# Altium PCB stm32nes.PcbDoc
Units mil, origin at the board's own origin, x right, y up, seen from the top; angles counter-clockwise.
Board outline 7285 x 3450 mil, 2 copper layers (Top Layer, Bottom Layer); 78 components, 69 nets, 338 pads, 745 vias.
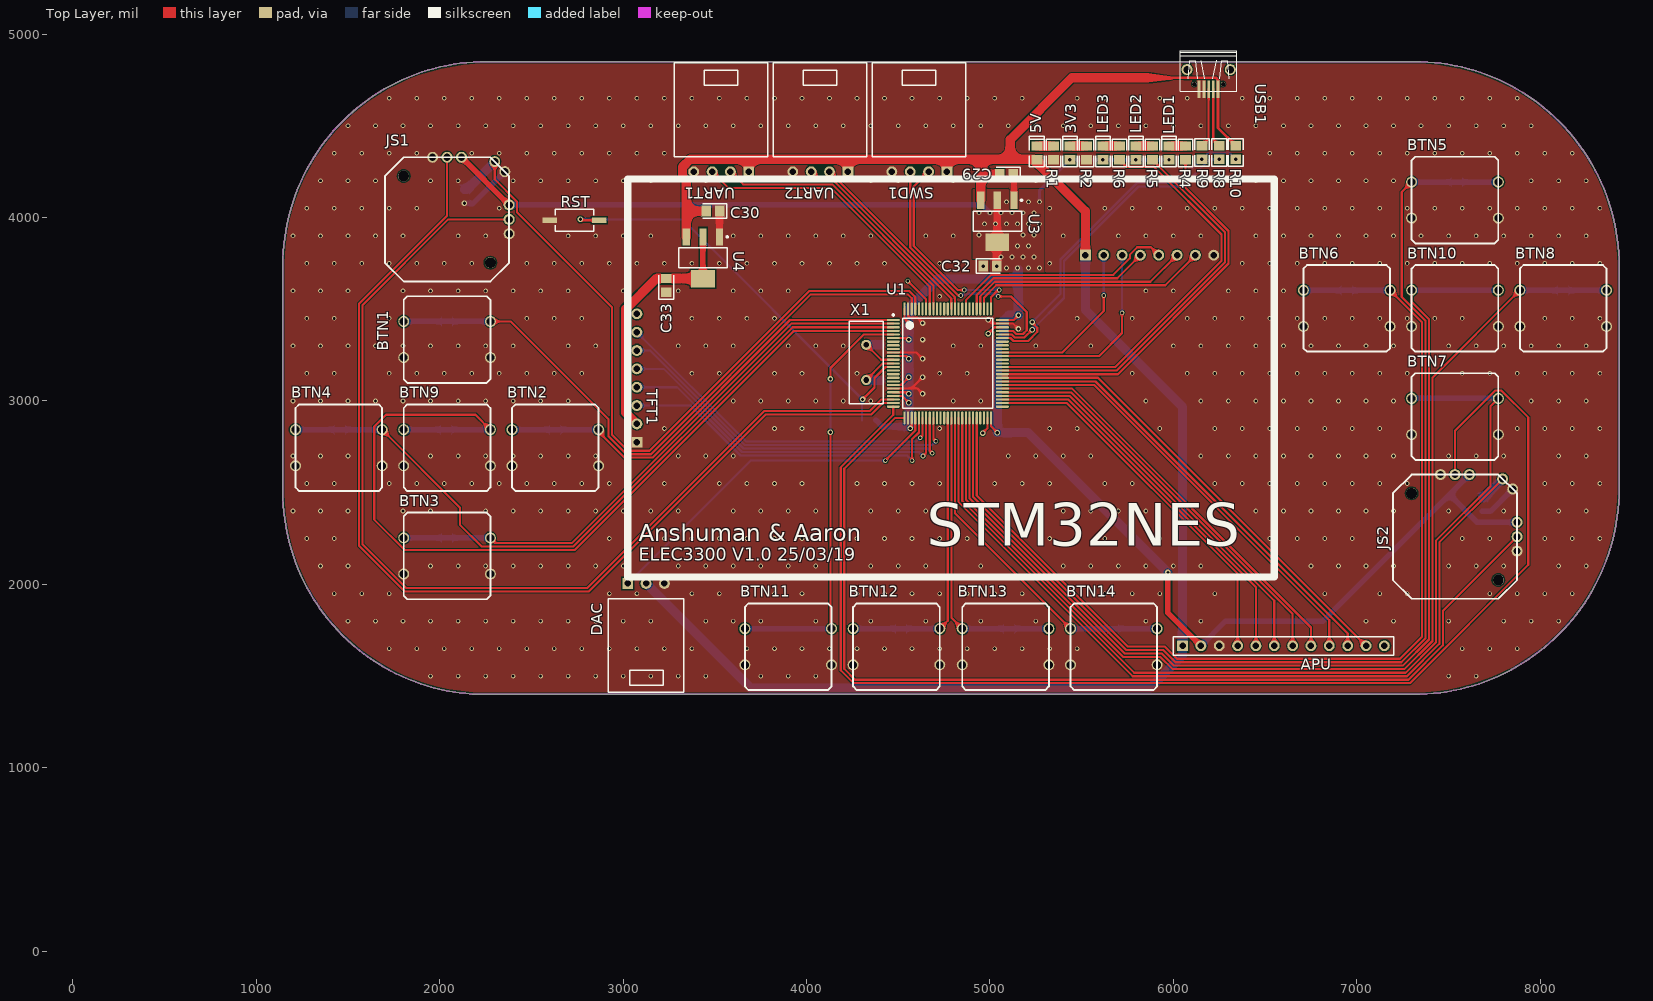
[diagram p0: Top Layer view]
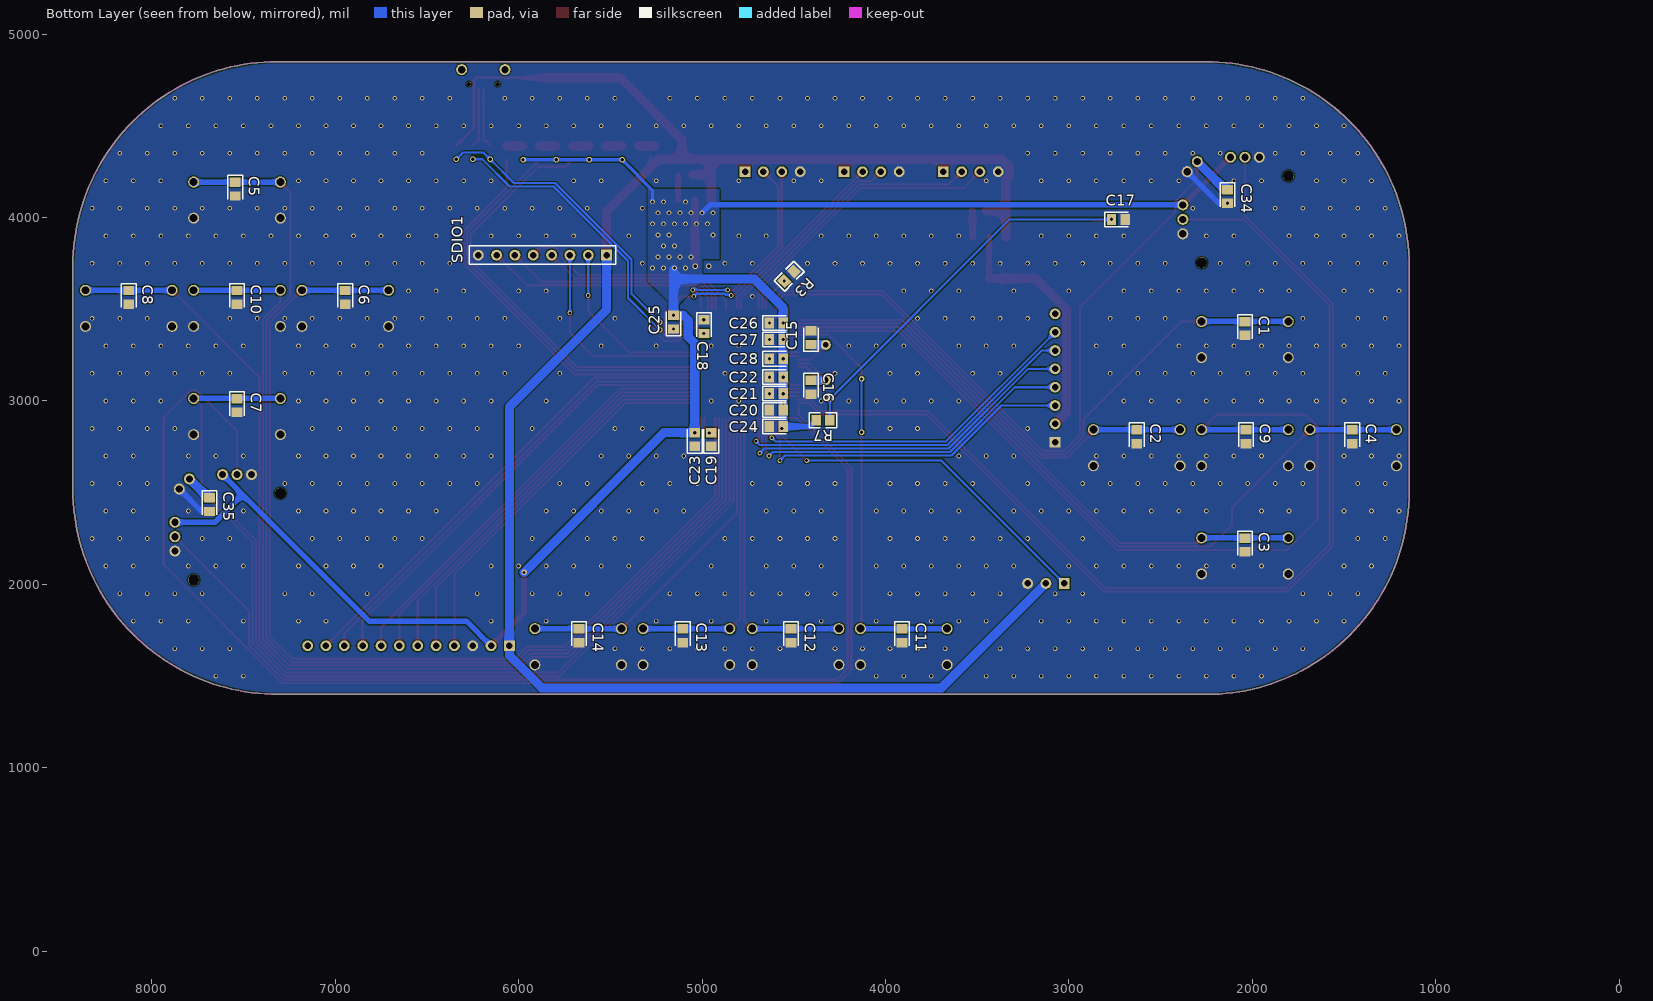
[diagram p1: Bottom Layer view, seen from below]
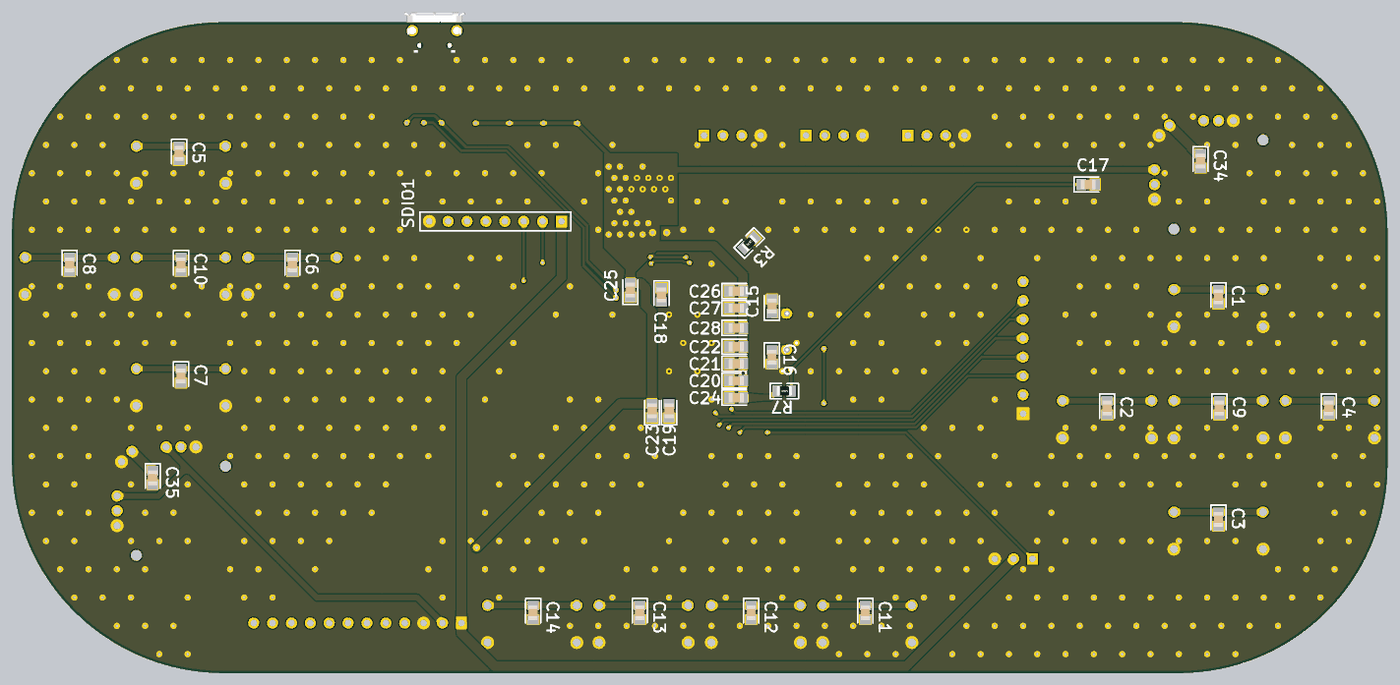
[diagram p2: 3D render of the assembled board from below, using the file's embedded part models]

## Layer stack, top to bottom
Top Solder: solder mask 0.4, Solder Resist, Dk 3.5
Top Layer: signal copper 1.4
Dielectric 1: dielectric 12.6, FR-4, Dk 4.8
Bottom Layer: signal copper 1.4
Bottom Solder: solder mask 0.4, Solder Resist, Dk 3.5

## Board outline
2250,1400 7310,1400 ccw(c7310,2520) 8430,2520 8430,3735 ccw(c7315,3735) 7315,4850 2255,4850 ccw(c2255,3740) 1145,3740 1145,2505 ccw(c2250,2505)

## Design rules (kind name [scope] priority, off if disabled: settings)
AssemblyTestPointUsage [All] p1 off:
AssemblyTestpoint [All] p1 off: testpointundercomponent=TRUE minsize=40 maxsize=100 preferedsize=60 minholesize=0 maxholesize=40 preferedholesize=32 testpointgrid=1 usegrid=TRUE gridtolerance=0.01 allowsidetop=TRUE allowsidebottom=TRUE
Clearance [All] p1: gap=7
ComponentClearance [All] p1 off: gap=10 collisioncheckmode=3 verticalgap=10 showdistances=FALSE
DiffPairsRouting [All] p1 off: maxlimit=10 minlimit=10 mostfreqgap=10 toplayer_minwidth=15 toplayer_maxwidth=15 toplayer_prefwidth=15 bottomlayer_minwidth=15 bottomlayer_maxwidth=15 bottomlayer_prefwidth=15 maxuncoupledlength=500
FabricationTestPointUsage [All] p1 off: valid=0 allowmultiple=FALSE
FabricationTestpoint [All] p1 off: side=3 testpointundercomponent=TRUE minsize=40 maxsize=100 preferedsize=60 minholesize=0 maxholesize=40 preferedholesize=32 testpointgrid=1 allowsidetop=TRUE allowsidebottom=TRUE usegrid=TRUE gridtolerance=0.01
FanoutControl Fanout_BGA [IsBGA] p1 off: bgadir=Out bgaviamode=Centered fanoutstyle=Auto fanoutdirection=Alternating viagrid=1 // Fanout_BGA (Default Rule)
FanoutControl Fanout_LCC [IsLCC] p2 off: bgadir=Out bgaviamode=Centered fanoutstyle=Auto fanoutdirection=Alternating viagrid=1 // Fanout_LCC (Default Rule)
FanoutControl Fanout_SOIC [IsSOIC] p3 off: bgadir=Out bgaviamode=Centered fanoutstyle=Auto fanoutdirection=Alternating viagrid=1 // Fanout_SOIC (Default Rule)
FanoutControl Fanout_Small [(CompPinCount < 5)] p4 off: bgadir=Out bgaviamode=Centered fanoutstyle=Auto fanoutdirection=OutThenIn viagrid=1 // Fanout_Small (Default Rule)
FanoutControl Fanout_Default [All] p5 off: bgadir=Out bgaviamode=Centered fanoutstyle=Auto fanoutdirection=Alternating viagrid=1 // Fanout_Default (Default Rule)
Height [All] p1 off: minheight=0 maxheight=1000 prefheight=500
HoleSize [All] p1: absolutevalues=TRUE maxlimit=99999 minlimit=12 maxpercent=80.000 minpercent=20.000
HoleToHoleClearance [All] p1 off: gap=10 allowstackedmicrovias=TRUE
LayerPairs [All] p1 off: enforce=TRUE
MinimumSolderMaskSliver [All] p1 off: minsoldermaskwidth=10
NetAntennae [All] p1 off: netantennaetolerance=0
PasteMaskExpansion [All] p1 off: expansion=0
PlaneConnect [All] p1: planeconnectstyle=Direct reliefexpansion=20 reliefentries=4 reliefconductorwidth=10 reliefairgap=10
PolygonConnect [All] p1: connectstyle=Direct reliefconductorwidth=10 reliefentries=4 polygonreliefangle="90 Angle" airgapwidth=10
RoutingCorners [All] p1 off: cornerstyle=45-Degree minsetback=100 maxsetback=100
RoutingLayers RoutingLayers_1 [All] p1: top layer_v5=TRUE bottom layer_v5=TRUE
RoutingPriority [All] p1 off: routingpriority=0
RoutingTopology [All] p1 off: topology=Shortest
RoutingVias [All] p1: holewidth=12 width=20 viastyle="Through Hole" minholewidth=10 minwidth=15 maxholewidth=28 maxwidth=50
ShortCircuit [All] p1: allowed=TRUE
SilkToSilkClearance [All] p1 off: silktosilkclearance=10
SilkToSolderMaskClearance [IsPad] p1 off: minsilkscreentomaskgap=10 clearancetoexposedcopper=TRUE
SolderMaskExpansion [All] p1 off: expansion=4
UnpouredPolygon [All] p1 off: allowunpoured=FALSE
Width [All] p1: maxlimit=99999 minlimit=7 preferedwidth=10 minimp=50.000000 maximp=50.000000 favimp=50.000000
3 further rules are at their usual default settings.

## Components (designator, comment, footprint, x,y, rotation, side; value= is the part's Value field where it differs from the comment)
3V3 "A" D0805 5435.41,4352.75 r90 top (schematic designator D2)
5V "A" D0805 5255.41,4352.75 r90 top (schematic designator D1)
APU "Header 12" HDR1X12 6050,1665 r0 top
BTN1 "BTN" PCBComponent_1 2040,3335 r0 top
BTN2 "BTN" PCBComponent_1 2630,2745 r0 top
BTN3 "BTN" PCBComponent_1 2040,2155 r0 top
BTN4 "BTN" PCBComponent_1 1450,2745 r0 top
BTN5 "BTN" PCBComponent_1 7535,4095 r0 top
BTN6 "BTN" PCBComponent_1 6945,3505 r0 top
BTN7 "BTN" PCBComponent_1 7535,2915 r0 top
BTN8 "BTN" PCBComponent_1 8125,3505 r0 top
BTN9 "BTN" PCBComponent_1 2040,2745 r0 top
BTN10 "BTN" PCBComponent_1 7535,3505 r0 top
BTN11 "BTN" PCBComponent_1 3900,1660 r0 top
BTN12 "BTN" PCBComponent_1 4490,1660 r0 top
BTN13 "BTN" PCBComponent_1 5085,1660 r0 top
BTN14 "BTN" PCBComponent_1 5675,1660 r0 top
C1 "100nF" CC2012-0805 2040,3395 r270 bottom
C2 "100nF" CC2012-0805 2630,2805 r270 bottom
C3 "100nF" CC2012-0805 2040,2215 r270 bottom
C4 "100nF" CC2012-0805 1455,2805 r270 bottom
C5 "100nF" CC2012-0805 7545,4155 r270 bottom
C6 "100nF" CC2012-0805 6945,3565 r270 bottom
C7 "100nF" CC2012-0805 7535,2975 r270 bottom
C8 "100nF" CC2012-0805 8125,3565 r270 bottom
C9 "100nF" CC2012-0805 2035,2805 r270 bottom
C10 "100nF" CC2012-0805 7535,3565 r270 bottom
C11 "100nF" CC2012-0805 3910,1720 r270 bottom
C12 "100nF" CC2012-0805 4515,1720 r270 bottom
C13 "100nF" CC2012-0805 5105,1720 r270 bottom
C14 "100nF" CC2012-0805 5670,1720 r270 bottom
C15 "20pF" CC2012-0805 4405,3345 r90 bottom
C16 "20pF" CC2012-0805 4405,3075 r270 bottom
C17 "100nF" CC2012-0805 2730,3990 r180 bottom
C18 "2.2uF" CC2012-0805 4990,3405 r270 bottom
C19 "2.2uF" CC2012-0805 4950,2790 r90 bottom
C20 "100nF" CC2012-0805 4595,2950 r180 bottom
C21 "100nF" CC2012-0805 4595,3040 r180 bottom
C22 "100nF" CC2012-0805 4595,3130 r180 bottom
C23 "100nF" CC2012-0805 5040,2790 r90 bottom
C24 "100nF" CC2012-0805 4595,2860 r180 bottom
C25 "100nF" CC2012-0805 5155,3430 r90 bottom
C26 "100nF" CC2012-0805 4595,3425 r180 bottom
C27 "100nF" CC2012-0805 4595,3335 r180 bottom
C28 "100nF" CC2012-0805 4595,3230 r180 bottom
C29 "10uF" CC2012-0805 5090,4235 r180 top
C30 "10uF" CC2012-0805 3490,4035 r180 top
C32 "10uF" CC2012-0805 5000,3735 r0 top
C33 "10uF" CC2012-0805 3235,3630 r90 top
C34 "100nF" CC2012-0805 2135,4115 r270 bottom
C35 "100nF" CC2012-0805 7685,2435 r270 bottom
DAC "DAC" LOCKEDHDR-3W 3125,2005 r0 top
JS1 "Joystick" B10K-1 2040,3990 r0 top
JS2 "Joystick" B10K-1 7535,2260 r0 top
LED1 "A" D0805 5975.41,4352.75 r90 top (schematic designator D3)
LED2 "A" D0805 5795.41,4352.75 r90 top (schematic designator D4)
LED3 "A" D0805 5615.41,4352.75 r90 top (schematic designator D5)
R1 "330R" CR2012-0805 5345.41,4352.75 r270 top
R2 "330R" CR2012-0805 5525.41,4352.75 r270 top
R3 "10K" CR2012-0805 4525,3680 r315 bottom
R4 "330R" CR2012-0805 6065.41,4352.75 r270 top
R5 "330R" CR2012-0805 5885.41,4352.75 r270 top
R6 "330R" CR2012-0805 5705.41,4352.75 r270 top
R7 "10K" CR2012-0805 4340,2895 r180 bottom
R8 "20" CR2012-0805 6250,4355 r270 top
R9 "20" CR2012-0805 6155,4355 r270 top
R10 "1K5" CR2012-0805 6340,4355 r90 top
RST "RST" "PUSH SWITCH 2-PIN" 2735,3985 r270 top (schematic designator SW2)
SDIO1 "SD CARD" HDR1X8 5520,3795 r0 bottom
SWD1 "NES STLINK" LOCKEDHDR-4W 4615,4250 r180 top
TFT1 "TFT" HDR1X8 3075,2775 r90 top
U1 "STM32F407VET6" LQFP100_N 4770,3205 r0 top
U3 "LM1117MP-3.3" MP04A_N 5040,3980 r270 top
U4 "LM1117MP-3.3" MP04A_N 3435,3780 r270 top
UART1 "NES UART" LOCKEDHDR-4W 3535,4250 r180 top
UART2 "NES UART" LOCKEDHDR-4W 4075,4250 r180 top
USB1 "USB" USB-UB-S-HM 6140,4700 r270 top
X1 "8MHz" BCY-W2/E4.7 4325,3210 r90 top

## Footprints (in the part's own frame and the unit in brackets; to place one, negate y for a bottom-side part, rotate by r counter-clockwise, add the part's x,y. Pads: shape width x height; smd on the part's side, far side on the other; paste and mask are expansions set on the pad)
B10K-1 [mm]
  round 1.524 hole 1: 1(2,8.6) 2(0,8.6) 3(-2,8.6) 4(8.6,2) 5(8.6,0) 6(8.6,-2) 7(6.6,8) 8(8,6.6)
  round 1.524 hole 1.5: 9(-6,6) 10(6,-6)
  silkscreen extent -8.6,-8.6 8.6,8.6
BCY-W2/E4.7 [mm]
  round 1.4 hole 0.8: 1(-2.44,-0.002) 2(2.44,-0.002)
  silkscreen extent -5.7,-2.35 5.7,2.35, body extent -5.67,-2.32 5.68,2.33, height 3.6
CC2012-0805 [mm] "Chip Capacitor; Body 2.0 x 1.2 mm (LxW typ)"
  rect 1.3x1.5 smd: 1(-0.95,0) 2(0.95,0)
  silkscreen extent -1.91,-1.02 1.4,1.02, body extent -0.99,-0.64 1.01,0.61, height 0.58
CR2012-0805 [mm] "Chip Resistor; Body 2.0 x 1.3 mm (LxW typ)"
  rect 1.3x1.5 smd: 1(-0.95,0) 2(0.95,0)
  silkscreen extent -1.91,-1.02 1.91,1.02, body extent -0.98,-0.62 1.02,0.63, height 0.58
D0805 [mm]
  rect 1.3x1.5 smd: 1(-0.95,0) 2(0.95,0)
  silkscreen extent -1.91,-1.02 2.3,1.02, body extent -0.98,-0.49 1.02,0.51, height 0.48
HDR1X8 [mm] "Connector; Header; 4 Position"
  rect 1.5x1.5 hole 0.9: 1(0,0)
  round 1.5 hole 0.9: 2(2.54,0) 3(5.08,0) 4(7.62,0) 5(10.16,0) 6(12.7,0) 7(15.24,0) 8(17.78,0)
  silkscreen extent -1.27,-1.27 19.05,1.27
HDR1X12 [mm] "Connector; Header; 4 Position"
  rect 1.5x1.5 hole 0.9: 1(0,0)
  round 1.5 hole 0.9: 2(2.54,0) 3(5.08,0) 4(7.62,0) 5(10.16,0) 6(12.7,0) 7(15.24,0) 8(17.78,0) 9(20.32,0) 10(22.86,0) 11(25.4,0) 12(27.94,0)
  silkscreen extent -1.27,-1.27 29.21,1.27
LOCKEDHDR-3W [mm] "3-pin header with lock"
  rect 1.5x1.5 hole 0.9: 1(-2.54,0)
  round 1.5 hole 0.9: 2(0,0) 3(2.54,0)
  silkscreen extent -5.23,-15.09 5.23,-2.08
LOCKEDHDR-4W [mm] "5-pin header with lock"
  rect 1.5x1.5 hole 0.9: 1(-3.81,0)
  round 1.5 hole 0.9: 2(-1.27,0) 3(1.27,0) 4(3.81,0)
  silkscreen extent -6.45,-15.09 6.5,-2.08
LQFP100_N [mm] "Thin QFP, 100-Leads, Body 14x14mm, Pitch 0.5mm, IPC Medium Density"
  oval 1.8x0.3 smd: 1(-7.55,6) 2(-7.55,5.5) 3(-7.55,5) 4(-7.55,4.5) 5(-7.55,4) 6(-7.55,3.5) 7(-7.55,3) 8(-7.55,2.5) 9(-7.55,2) 10(-7.55,1.5) 11(-7.55,1) 12(-7.55,0.5) 13(-7.55,0) 14(-7.55,-0.5) 15(-7.55,-1) 16(-7.55,-1.5) 17(-7.55,-2) 18(-7.55,-2.5) 19(-7.55,-3) 20(-7.55,-3.5) 21(-7.55,-4) 22(-7.55,-4.5) 23(-7.55,-5) 24(-7.55,-5.5) 25(-7.55,-6) 51(7.55,-6) 52(7.55,-5.5) 53(7.55,-5) 54(7.55,-4.5) 55(7.55,-4) 56(7.55,-3.5) 57(7.55,-3) 58(7.55,-2.5) 59(7.55,-2) 60(7.55,-1.5) 61(7.55,-1) 62(7.55,-0.5) 63(7.55,0) 64(7.55,0.5) 65(7.55,1) 66(7.55,1.5) 67(7.55,2) 68(7.55,2.5) 69(7.55,3) 70(7.55,3.5) 71(7.55,4) 72(7.55,4.5) 73(7.55,5) 74(7.55,5.5) 75(7.55,6)
  oval 0.3x1.8 smd: 26(-6,-7.55) 27(-5.5,-7.55) 28(-5,-7.55) 29(-4.5,-7.55) 30(-4,-7.55) 31(-3.5,-7.55) 32(-3,-7.55) 33(-2.5,-7.55) 34(-2,-7.55) 35(-1.5,-7.55) 36(-1,-7.55) 37(-0.5,-7.55) 38(0,-7.55) 39(0.5,-7.55) 40(1,-7.55) 41(1.5,-7.55) 42(2,-7.55) 43(2.5,-7.55) 44(3,-7.55) 45(3.5,-7.55) 46(4,-7.55) 47(4.5,-7.55) 48(5,-7.55) 49(5.5,-7.55) 50(6,-7.55) 76(6,7.55) 77(5.5,7.55) 78(5,7.55) 79(4.5,7.55) 80(4,7.55) 81(3.5,7.55) 82(3,7.55) 83(2.5,7.55) 84(2,7.55) 85(1.5,7.55) 86(1,7.55) 87(0.5,7.55) 88(0,7.55) 89(-0.5,7.55) 90(-1,7.55) 91(-1.5,7.55) 92(-2,7.55) 93(-2.5,7.55) 94(-3,7.55) 95(-3.5,7.55) 96(-4,7.55) 97(-4.5,7.55) 98(-5,7.55) 99(-5.5,7.55) 100(-6,7.55)
  silkscreen extent -7.67,-6.25 6.25,6.82, body extent -8,-7.99 8,8.01, height 1.5
MP04A_N [mm] "SOT223, 4-Leads, Body 6.5x3.5mm, Pitch 2.3mm, Lead Span 7mm, IPC Medium Density"
  rect 2.4x1 smd: 1(-2.9,2.3) 2(-2.9,0) 3(-2.9,-2.3)
  rect 2.4x3.3 smd: 4(2.9,0)
  silkscreen extent -3.02,-3.35 1.4,3.48, body extent -3.43,-3.24 3.53,3.26, height 1.66
PCBComponent_1 [mm]
  round 1.524 hole 1.1: 1(-6,2.5) 1(6,2.5) 2(-6,-2.5) 2(6,-2.5)
  silkscreen extent -6,-6 6,6
"PUSH SWITCH 2-PIN" [mm]
  rect 0.8x2 smd: 1(-0.001,-3.425) 2(-0.001,3.425)
  silkscreen extent -1.52,-2.64 1.52,2.64
USB-UB-S-HM [mil]
  rect 95x15 smd: D+(0,52.05) D-(0,77.67) GND(0,-0.18) ID(0,26.43) VBUS(0,103.29)
  round 25 hole 25: P$5(-27.56,130.79) P$6(-27.56,-26.69)
  round 60 hole 40: TAB(-106.3,-66.06) TAB(-106.3,170.16)
  silkscreen extent -209,-101 12,206, body extent -204,-109 10,214, height 103

## Part data
3V3 5V LED1 LED2 LED3: library part LED, "Typical RED GaAs LED"
APU: "Header, 12-Pin"
BTN1 BTN2 BTN3 BTN4 BTN5 BTN6 BTN7 BTN8 BTN9 BTN10 BTN11 BTN12 BTN13 BTN14 RST: library part SW-SPST, "Single-Pole, Single-Throw Switch"
C1 C2 C3 C4 C5 C6 C7 C8 C9 C10 C11 C12 C13 C14 C15 C16 C17 C18 C19 C20 C21 C22 C23 C24 C25 C26 C27 C28 C29 C30 C32 C33 C34 C35: library part "Cap Semi", "Capacitor (Semiconductor SIM Model)"
DAC: library part "Header 3", "Header, 3-Pin"
JS1 JS2: library part B10K-1
R1 R2 R3 R4 R5 R6 R7 R8 R9 R10: library part "Res Semi", "Semiconductor Resistor"
SDIO1 TFT1: library part "Header 8", "Header, 8-Pin"
SWD1 UART1 UART2: library part "Header 4", "Header, 4-Pin"
U1: "STM32 ARM-based 32-bit MCU with 64 Kbytes Flash, 100-pin LQFP, Industrial Temperature"
U3 U4: "800mA Low-Dropout Linear Regulator"
USB1: library part "USB Series Micro-B"
X1: library part XTAL, "Crystal Oscillator"

## Via types
v1: diameter 25, hole 15, Top Layer to Bottom Layer, 710 vias
v2: diameter 30, hole 18, Top Layer to Bottom Layer, 35 vias

## Nets (pads, with @x,y where several pads share a name; then routed paths per layer and width w, separated by ;. In a path a pad name is that pad's centre, name@x,y a point inside that pad or via, vN(x,y) a via of type N, cw(c..) or ccw(c..) an arc to the next point about the centre after c; other vN are vias at no path point)
3V3: 3V3.1 APU.2 C20.2 C21.2 C22.2 C23.2 C24.2 C25.2 C26.2 C27.2 C28.2 C32.2 JS1.1 JS1.4 JS2.1 JS2.4 LED1.1 LED2.1 LED3.1 R7.1 U1.6 U1.11 U1.19 U1.21 U1.22 U1.28 U1.50 U1.75 U1.100 U3.2 U3.4 | length 11497.3
  Top Layer w12: U1.22 4519.76,3027.83 v2(4557.6,2990) ; U1.21 4550.08,3047.52 v2(4557.6,3040) ; U1.19 4514.49,3086.89 v2(4557.6,3130) ; U1.11 4543.23,3244.37 v2(4557.6,3230) ; U1.6 4549.8,3342.8 v2(4557.6,3335) ; U1.100 4533.78,3448.82 v2(4557.6,3425) ; v2(4565,2850) 4573.15,2858.15 U1.28 ; U1.50 5006.22,2861.18 v2(5040,2827.4) ; U1.75 5128.82,3441.22 v2(5155,3467.4)
  Top Layer w30: JS1.1 JS1.4 ; v2(5970,2065) 5970,1845 APU.2
  Top Layer w40: v2(5037.4,3735) U3.4@5037.4,3863.23 ; U3.4 U3.2
  Top Layer w50: U3.4@5037.4,3863.23 U3.4
  Bottom Layer w18: v1(5270,4085) 5270,4149.94 v2(5435.41,4315.35) v2(5615.41,4315.35) v2(5795.41,4315.35) v2(5975.41,4315.35)
  Bottom Layer w30: JS1.4 4956.26,4068.74 v1(5000,4025) ; R7.1 4412.4,2860 C24.2 ; 4552.6,2895 4557.6,2900 ; APU.2 6285,1800 6815.16,1800 7505,2489.84 ; JS2.1 7505,2489.84 ; JS2.4 7656.1,2338.74 7505,2489.84
  Bottom Layer w50: C24.2 4557.6,2900 C20.2 v2(4557.6,2990) v2(4557.6,3040) v2(4557.6,3130) v2(4557.6,3230) v2(4557.6,3335) v2(4557.6,3425) 4557.6,3507.6 4715,3665 5155,3665 ; v1@5155,3715 5155,3665 ; v2(5970,2065) 5207.6,2827.4 v2(5040,2827.4) 5040,3315 5075,3350 5075,3440 5102.4,3467.4 v2(5155,3467.4) 5155,3665
  other v1: 5090,3725 5150,3725 5210,3725 5270,3725 5060,3785 5120,3785 5180,3785 5240,3785 5150,3845 5210,3845 4940,3905 5180,3905 5240,3905 4970,3965 5030,3965 5090,3965 5150,3965 5210,3965 5270,3965 4940,4025 5060,4025 5120,4025 5180,4025 5240,4025 5090,4085 5210,4085
5V: 5V.1 APU.1 C29.2 C30.2 DAC.2 R10.2 SDIO1.1 SWD1.1 U3.3 U4.3 UART1.1 UART2.1 USB1.VBUS | length 11017.4
  Top Layer w15: 5860,4762 6055.3,4762 6055.5,4761.8 6092.37,4761.8 6092.57,4762 6231.29,4762 6243.29,4750 USB1.VBUS 6243.29,4489.11 R10.2
  Top Layer w50: U4.3 3344.45,4035 ; C30.2 3344.45,4035 ; UART1.1 3685,4317.6 ; UART2.1 4225,4317.6 ; SWD1.1 4765,4317.6 ; U3.3 4949.45,4235 ; C29.2 4949.45,4235 ; SDIO1.1 5520,4035 5237.4,4317.6 5110,4317.6 ; 5860,4762 5859.71,4761.71 5446.71,4761.71 5110,4425 5110,4317.6 ; 3344.45,4035 3344.45,4203.54 3323.47,4224.51 3323.47,4275.49 3365.59,4317.6 3685,4317.6 ; 3685,4317.6 4225,4317.6 ; 4225,4317.6 4765,4317.6 ; 4765,4317.6 4949.45,4317.6 ; 4949.45,4235 4949.45,4317.6 ; 4949.45,4317.6 5110,4317.6
  Bottom Layer w50: DAC.2 3694,1436 5873.33,1436 6050,1612.67 APU.1 6050,2967.07 5520,3497.07 SDIO1.1
APU_IO1: APU.10 U1.58 | length 2519
  Top Layer w12: U1.58 5575.3,3106.57 6950,1731.87 APU.10
APU_IO2: APU.11 U1.59 | length 2588
  Top Layer w12: U1.59 5588.74,3126.26 APU.11
APU_IRQ: APU.7 U1.55 | length 2256.8
  Top Layer w12: U1.55 5067.93,3046.83 5441.3,3046.83 6650,1838.13 APU.7
APU_NSS: APU.8 U1.56 | length 2322.1
  Top Layer w12: U1.56 5447.8,3067.2 6750,1765 APU.8
APU_RST: APU.9 U1.57 | length 2453.7
  Top Layer w12: U1.57 5568.11,3086.89 6850,1805 APU.9
APU_SPI_MISO: APU.5 U1.53 | length 2126.2
  Top Layer w12: U1.53 5426.24,3008.15 6450,1984.39 APU.5
APU_SPI_MOSI: APU.6 U1.54 | length 2191.5
  Top Layer w12: U1.54 5433.43,3027.83 6550,1911.26 APU.6
APU_SPI_SCLK: APU.4 U1.52 | length 2060.9
  Top Layer w12: U1.52 5419.06,2988.46 6350,2057.52 APU.4
BTN1: BTN1.1 C1.1 U1.98 | length 3550.1
  Top Layer w12: BTN1.1@2276.22,3433.43 2386.57,3433.43 2920,2900 2920,2808.13 3018.13,2710 3151.87,2710 4022.87,3581 4552.13,3581 4573.15,3559.98 U1.98
  Bottom Layer w30: BTN1.1@1803.78,3433.43 BTN1.1@2276.22,3433.43
BTN2: BTN2.1 C2.1 U1.1 | length 2459.6
  Top Layer w12: BTN2.1@2866.22,2843.43 2866.22,2831.91 3007.13,2691 3159.74,2691 3909.96,3441.22 U1.1
  Bottom Layer w30: BTN2.1@2393.78,2843.43 BTN2.1@2866.22,2843.43
BTN3: BTN3.1 C3.1 U1.2 | length 3176.4
  Top Layer w12: BTN3.1@2276.22,2253.43 2304.65,2225 2720.61,2225 3917.15,3421.54 U1.2
  Bottom Layer w30: BTN3.1@1803.78,2253.43 BTN3.1@2276.22,2253.43
BTN4: BTN4.1 C4.1 U1.3 | length 4073.8
  Top Layer w12: BTN4.1@1686.22,2843.43 2110,2419.65 2110,2325 2229,2206 2728.48,2206 3924.33,3401.85 U1.3
  Bottom Layer w30: BTN4.1@1213.78,2843.43 BTN4.1@1686.22,2843.43
BTN5: BTN5.1 C5.1 U1.45 | length 6358.7
  Top Layer w12: U1.45 4907.8,2477.32 5742.54,1642.57 5944.77,1642.57 6011.35,1576 7242.87,1576 7374,1707.13 7374,3437.52 7245,3566.52 7245,4139.65 BTN5.1@7298.78,4193.43
  Bottom Layer w30: BTN5.1@7298.78,4193.43 BTN5.1@7771.22,4193.43
BTN6: BTN6.1 C6.1 U1.46 | length 5701.8
  Top Layer w12: U1.46 4927.48,2484.5 5750.41,1661.57 5952.64,1661.57 6019.22,1595 7235,1595 7355,1715 7355,3429.65 BTN6.1@7181.22,3603.43
  Bottom Layer w30: BTN6.1@6708.78,3603.43 BTN6.1@7181.22,3603.43
BTN7: BTN7.1 C7.1 U1.42 | length 5434
  Top Layer w12: U1.42 4848.74,2455.76 5785.93,1518.57 7266.05,1518.57 7431,1683.52 7431,2237.99 7728.22,2535.21 7728.22,2970.43 BTN7.1@7771.22,3013.43
  Bottom Layer w30: BTN7.1@7298.78,3013.43 BTN7.1@7771.22,3013.43
BTN8: BTN8.1 C8.1 U1.43 | length 6017
  Top Layer w12: U1.43 4868.43,2462.95 5726.8,1604.57 5929.03,1604.57 5995.61,1538 7258.61,1538 7412,1691.39 7412,3126.65 BTN8.1@7888.78,3603.43
  Bottom Layer w30: BTN8.1@7888.78,3603.43 BTN8.1@8361.22,3603.43
BTN9: BTN9.1 C9.1 U1.4 | length 5067.1
  Top Layer w12: BTN9.1@2276.22,2843.43 2194.65,2925 1706.98,2925 1643.22,2861.24 1643.22,2353.17 1809.39,2187 2736.35,2187 3931.52,3382.17 U1.4
  Bottom Layer w30: BTN9.1@1803.78,2843.43 BTN9.1@2276.22,2843.43
BTN10: BTN10.1 C10.1 U1.44 | length 5795.3
  Top Layer w12: U1.44 4888.11,2470.13 5734.67,1623.57 5936.9,1623.57 6003.48,1557 7250.74,1557 7393,1699.26 7393,3445.39 7298.78,3539.61 BTN10.1@7298.78,3603.43
  Bottom Layer w30: BTN10.1@7298.78,3603.43 BTN10.1@7771.22,3603.43
BTN11: BTN11.1 C11.1 U1.5 | length 2319.1
  Top Layer w12: v2(4130,2830) 4130,1764.65 BTN11.1@4136.22,1758.43 ; v2(4130,3120) 4130,3180 4312.48,3362.48 U1.5
  Bottom Layer w12: v2(4130,2830) 4130,3110 4135,3115 v2(4130,3120)
  Bottom Layer w30: BTN11.1@3663.78,1758.43 BTN11.1@4136.22,1758.43
BTN12: BTN12.1 C12.1 U1.38 | length 1639.9
  Top Layer w12: BTN12.1@4726.22,1758.43 4770,1802.2 U1.38
  Bottom Layer w30: BTN12.1@4253.78,1758.43 BTN12.1@4726.22,1758.43
BTN13: BTN13.1 C13.1 U1.39 | length 1646.2
  Top Layer w12: U1.39 4789.69,1817.52 BTN13.1@4848.78,1758.43
  Bottom Layer w30: BTN13.1@4848.78,1758.43 BTN13.1@5321.22,1758.43
BTN14: BTN14.1 C14.1 U1.40 | length 1882.5
  Top Layer w12: U1.40 4809.37,2387.83 BTN14.1@5438.78,1758.43
  Bottom Layer w30: BTN14.1@5438.78,1758.43 BTN14.1@5911.22,1758.43
DAC_OUT: DAC.1 U1.29 | length 1984
  Top Layer w12: v1(4430,2675) 4429.6,2675 4593,2838.4 4593,2876.13 4592.15,2876.98 4592.15,2907.07 U1.29
  Bottom Layer w12: DAC.1 3695,2675 v1(4430,2675)
GND: APU.3 BTN1.2 BTN2.2 BTN3.2 BTN4.2 BTN5.2 BTN6.2 BTN7.2 BTN8.2 BTN9.2 BTN10.2 BTN11.2 BTN12.2 BTN13.2 BTN14.2 C1.2 C2.2 C3.2 C4.2 C5.2 C6.2 C7.2 C8.2 C9.2 C10.2 C11.2 C12.2 C13.2 C14.2 C15.2 C16.2 C17.2 C18.1 C19.1 C20.1 C21.1 C22.1 C23.1 C24.1 C25.1 C26.1 C27.1 C28.1 C29.1 C30.1 C32.1 C33.1 C34.2 C35.2 DAC.3 JS1.3 JS1.6 JS1.8 JS2.3 JS2.6 JS2.8 R1.2 R2.2 R3.1 RST.1 SDIO1.8 SWD1.4 TFT1.1 U1.10 U1.20 U1.27 U1.74 U1.99 U3.1 U4.1 UART1.4 UART2.4 USB1.GND USB1.ID | length 1537.2
  Top Layer w12: U1.20 4530.92,3067.2 4531.72,3068 4570.4,3068 ; U1.10 4598.35,3264.06 v2(4632.4,3230) ; U1.99 4553.46,3465.67 4565.32,3453.81 4603.59,3453.81 v2(4632.4,3425) ; v2(4632.4,3040) 4604.4,3068 4570.4,3068 ; v2(4632.4,3130) 4570.4,3068 ; v2(4990,3442.4) 5010.87,3421.54 U1.74 5126.06,3421.54 v2(5155,3392.6)
  Top Layer w30: U3.1 C29.1@5130.55,4231.85
  Top Layer w40: U4.1 3525.55,4033.15 C30.1
  Bottom Layer w30: v2(2135,4077.6) 2182.72,4077.6 JS1.8 ; C35.2 7727.72,2397.6 JS2.8
  other v1: 1950,1500 2100,1500 2250,1500 2400,1500 2550,1500 2700,1500 2850,1500 3000,1500 3150,1500 3300,1500 3450,1500 3750,1500 3900,1500 4050,1500 7500,1500 7650,1500 1725,1650 1875,1650 2025,1650 2175,1650 2325,1650 2475,1650 2625,1650 2775,1650 2925,1650 3075,1650 3225,1650 3375,1650 3675,1650 3825,1650 3975,1650 4125,1650 4275,1650 4425,1650 4575,1650 4725,1650 4875,1650 5025,1650 5175,1650 5325,1650 5475,1650 7575,1650 7725,1650 7875,1650 1500,1800 1650,1800 1800,1800 1950,1800 2100,1800 2250,1800 2400,1800 2550,1800 2700,1800 2850,1800 3000,1800 3150,1800 3450,1800 3600,1800 3750,1800 4050,1800 4350,1800 4650,1800 4950,1800 5250,1800 5850,1800 6150,1800 7050,1800 7200,1800 7500,1800 7800,1800 7950,1800 8100,1800 1425,1950 1575,1950 1725,1950 2925,1950 3075,1950 3375,1950 3525,1950 3675,1950 3825,1950 3975,1950 4275,1950 4425,1950 4575,1950 4725,1950 4875,1950 5025,1950 5175,1950 5625,1950 5775,1950 5925,1950 6225,1950 6825,1950 7125,1950 7275,1950 7725,1950 7875,1950 8025,1950 8175,1950 1350,2100 1500,2100 1950,2100 2100,2100 2250,2100 2400,2100 2550,2100 2700,2100 2850,2100 3000,2100 3300,2100 3450,2100 3600,2100 3750,2100 3900,2100 4050,2100 4350,2100 4500,2100 4650,2100 4950,2100 5400,2100 5550,2100 5700,2100 5850,2100 6000,2100 6150,2100 6750,2100 6900,2100 7050,2100 7200,2100 7500,2100 7650,2100 7800,2100 8100,2100 8250,2100 1275,2250 1425,2250 2925,2250 3225,2250 3375,2250 3525,2250 3675,2250 3825,2250 3975,2250 4275,2250 4425,2250 4575,2250 4725,2250 4875,2250 5325,2250 5475,2250 5625,2250 5925,2250 6525,2250 6675,2250 6825,2250 6975,2250 7125,2250 7575,2250 7725,2250 8025,2250 8175,2250 8325,2250 1200,2400 1350,2400 1500,2400 1800,2400 1950,2400 2250,2400 2400,2400 2550,2400 2700,2400 2850,2400 3000,2400 3150,2400 3300,2400 3600,2400 3750,2400 3900,2400 4050,2400 4350,2400 4500,2400 4650,2400 5100,2400 5250,2400 5400,2400 5550,2400 5700,2400 5850,2400 6450,2400 6600,2400 6750,2400 6900,2400 7050,2400 7200,2400 7500,2400 7800,2400 8100,2400 8250,2400 1275,2550 1425,2550 1725,2550 1875,2550 2025,2550 2175,2550 2325,2550 2475,2550 2625,2550 2775,2550 2925,2550 3225,2550 3525,2550 3675,2550 3825,2550 3975,2550 4275,2550 4425,2550 4575,2550 4725,2550 5025,2550 5175,2550 5325,2550 5625,2550 5775,2550 6225,2550 6375,2550 6525,2550 6675,2550 6825,2550 6975,2550 7125,2550 7275,2550 8025,2550 8175,2550 8325,2550 1200,2700 1350,2700 1500,2700 1950,2700 2100,2700 2250,2700 2400,2700 2550,2700 2700,2700 2850,2700 3300,2700 3450,2700 3600,2700 5100,2700 5250,2700 5400,2700 5550,2700 6150,2700 6300,2700 6450,2700 6600,2700 6750,2700 6900,2700 7050,2700 7200,2700 7500,2700 7650,2700 7800,2700 8100,2700 8250,2700 3225,2850 3825,2850 3975,2850 4725,2850 5325,2850 5475,2850 5925,2850 6225,2850 6375,2850 6525,2850 6675,2850 6825,2850 6975,2850 7125,2850 7875,2850 8025,2850 8175,2850 8325,2850 1200,3000 1350,3000 1500,3000 1650,3000 1800,3000 1950,3000 2100,3000 2250,3000 2400,3000 2550,3000 2700,3000 3600,3000 3750,3000 3900,3000 4050,3000 4200,3000 4350,3000 4800,3000 4950,3000 5850,3000 6150,3000 6300,3000 6450,3000 6600,3000 6750,3000 6900,3000 7050,3000 7200,3000 7950,3000 8100,3000 8250,3000 1275,3150 1425,3150 1725,3150 1875,3150 2025,3150 2175,3150 2325,3150 2475,3150 2625,3150 2775,3150 3375,3150 3525,3150 3825,3150 3975,3150 4275,3150 4725,3150 4875,3150 5775,3150 6075,3150 6225,3150 6375,3150 6525,3150 6675,3150 6825,3150 6975,3150 7125,3150 7275,3150 7575,3150 7725,3150 7875,3150 8025,3150 8175,3150 8325,3150 1200,3300 1350,3300 1500,3300 1650,3300 1800,3300 1950,3300 2100,3300 2250,3300 2400,3300 2700,3300 2850,3300 3300,3300 3450,3300 3600,3300 3900,3300 4050,3300 4200,3300 4800,3300 4950,3300 5250,3300 5550,3300 6000,3300 6150,3300 6300,3300 6450,3300 6600,3300 6750,3300 6900,3300 7050,3300 7200,3300 7500,3300 7650,3300 7800,3300 7950,3300 8100,3300 8250,3300 1275,3450 1425,3450 1725,3450 2475,3450 2625,3450 2775,3450 3225,3450 3375,3450 3525,3450 3675,3450 3825,3450 5475,3450 5775,3450 6075,3450 6225,3450 6375,3450 6525,3450 6675,3450 6825,3450 6975,3450 7125,3450 7275,3450 7425,3450 7575,3450 8025,3450 8175,3450 8325,3450 4725,3570 1200,3600 1350,3600 1500,3600 1800,3600 1950,3600 2100,3600 2250,3600 2400,3600 2550,3600 2700,3600 3000,3600 3300,3600 3600,3600 3750,3600 3900,3600 5850,3600 6000,3600 6300,3600 6450,3600 6600,3600 1275,3750 1425,3750 1575,3750 1725,3750 1875,3750 2025,3750 2175,3750 2475,3750 2625,3750 2775,3750 2925,3750 3075,3750 3225,3750 3375,3750 3525,3750 3675,3750 3825,3750 3975,3750 4125,3750 4275,3750 4425,3750 4725,3750 4875,3750 5325,3750 6375,3750 6525,3750 6675,3750 6825,3750 6975,3750 7125,3750 7275,3750 7425,3750 7575,3750 7725,3750 7875,3750 8025,3750 8175,3750 8325,3750 1200,3900 1350,3900 1500,3900 1650,3900 1800,3900 2100,3900 2250,3900 2700,3900 2850,3900 3000,3900 3150,3900 3600,3900 3750,3900 3900,3900 4050,3900 4200,3900 4350,3900 4650,3900 4800,3900 5400,3900 5700,3900 5850,3900 6000,3900 6150,3900 6450,3900 6600,3900 6750,3900 6900,3900 7050,3900 7200,3900 7350,3900 7500,3900 7650,3900 7800,3900 7950,3900 8100,3900 8250,3900 1275,4050 1425,4050 1575,4050 1725,4050 1875,4050 2325,4050 5325,4050 5625,4050 5775,4050 5925,4050 6075,4050 6225,4050 6375,4050 6525,4050 6675,4050 6825,4050 6975,4050 7125,4050 7275,4050 7425,4050 7575,4050 7725,4050 7875,4050 8025,4050 8175,4050 8325,4050 1350,4200 1500,4200 1650,4200 1950,4200 2100,4200 2400,4200 2550,4200 2700,4200 2850,4200 3000,4200 3150,4200 3450,4200 4350,4200 4500,4200 4800,4200 5250,4200 5550,4200 5700,4200 6150,4200 6300,4200 6450,4200 6600,4200 6750,4200 6900,4200 7050,4200 7200,4200 7950,4200 8100,4200 8250,4200 1425,4350 1575,4350 1725,4350 1875,4350 2175,4350 2325,4350 2475,4350 2625,4350 2775,4350 2925,4350 3075,4350 3225,4350 6525,4350 6675,4350 6825,4350 6975,4350 7125,4350 7275,4350 7425,4350 7575,4350 7725,4350 7875,4350 8025,4350 8175,4350 1500,4500 1650,4500 1800,4500 1950,4500 2100,4500 2250,4500 2400,4500 2550,4500 2700,4500 2850,4500 3000,4500 3150,4500 3300,4500 3450,4500 3600,4500 3750,4500 3900,4500 4050,4500 4200,4500 4350,4500 4500,4500 4650,4500 4800,4500 4950,4500 5100,4500 5250,4500 5400,4500 5550,4500 5700,4500 5850,4500 6000,4500 6150,4500 6300,4500 6450,4500 6600,4500 6750,4500 6900,4500 7050,4500 7200,4500 7350,4500 7500,4500 7650,4500 7800,4500 7950,4500 1725,4650 1875,4650 2025,4650 2175,4650 2325,4650 2475,4650 2625,4650 2775,4650 2925,4650 3075,4650 3225,4650 3375,4650 3525,4650 3675,4650 3825,4650 3975,4650 4125,4650 4275,4650 4425,4650 4575,4650 4725,4650 4875,4650 5025,4650 5175,4650 5475,4650 5625,4650 5775,4650 5925,4650 6075,4650 6375,4650 6525,4650 6675,4650 6825,4650 6975,4650 7125,4650 7275,4650 7425,4650 7575,4650 7725,4650 7875,4650
  other v2: 4632.4,3335 4962.6,3735
JOY1X: JS1.2 U1.24 | length 5758.6
  Top Layer w12: JS1.2 2040,4010 1560,3530 1560,2210.55 1809.55,1961 2812.87,1961 3777.87,2926 4352.87,2926 4415.33,2988.46 U1.24
JOY1Y: JS1.5 U1.23 | length 5715.5
  Top Layer w12: JS1.5 2046.87,3990 1579,3522.13 1579,2218.42 1817.42,1980 2805,1980 3770,2945 4345,2945 4407.46,3007.46 4472.07,3007.46 U1.23
JOY2X: JS2.2 U1.25 | length 7194.9
  Top Layer w12: U1.25 4472.76,2924.63 4186,2637.87 4186,1532.13 4256.56,1461.57 7289.66,1461.57 7935,2106.91 7935,2910.46 7789.03,3056.43 7753.41,3056.43 7535,2838.02 JS2.2
JOY2Y: JS2.5 U1.26 | length 5659.8
  Top Layer w12: U1.26 4482.76,2907.76 4205,2630 4205,1540 4264.43,1480.57 7281.79,1480.57 7469,1667.78 7469,1855.42 JS2.5
JS1_BTN: C34.1 JS1.7 U1.97 | length 4110.9
  Top Layer w12: JS1.7 2299.84,4208.29 2421.58,4086.55 2421.58,4028.42 2939,3511 2939,2816 3026,2729 3144,2729 4015,3600 4560,3600 4592.83,3567.17 U1.97
  Bottom Layer w50: C34.1 2147.28,4152.4 JS1.7
JS2_BTN: C35.1 JS2.7 U1.41 | length 4740.6
  Top Layer w12: U1.41 4829.06,2448.58 5778.06,1499.57 7273.92,1499.57 7450,1675.65 7450,2230.12 JS2.7
  Bottom Layer w50: C35.1 7692.28,2472.4 JS2.7
NES_LED1: R4.2 U1.60 | length 2146.7
  Top Layer w12: U1.60 5697.36,3145.94 6300.53,3749.12 6300.53,3927.1 6065.41,4162.22 R4.2
NES_LED2: R5.2 U1.61 | length 2181.7
  Top Layer w12: U1.61 5067.93,3166.32 5690.86,3166.32 6281.53,3756.99 6281.53,3919.23 R5.2
NES_LED3: R6.2 U1.62 | length 2304
  Top Layer w12: U1.62 5682.99,3185.32 6262.53,3764.86 6262.53,3907.47 5893.24,4276.76 5744,4276.76 R6.2
NES_SWCLK: SWD1.2 U1.76 | length 1136.8
  Top Layer w12: SWD1.2 4584,4169 4584,3844.74 4823.74,3605 v1(4860,3605) ; U1.76 5006.22,3567.28 5043.94,3605 v1(5050,3605)
  Bottom Layer w12: v1(4860,3605) 5025,3605 5035,3615 5045,3605 v1(5050,3605)
NES_SWDIO: SWD1.3 U1.72 | length 1450.6
  Top Layer w12: SWD1.3 4565,3836.87 4826.87,3575 v1(4840,3575) ; v1(5045,3570) 5115,3570 5200,3485 5200,3385 5179.6,3364.6 5143.4,3364.6 5125.84,3382.17 U1.72
  Bottom Layer w12: v1(4840,3575) 4844.5,3579.5 4870.56,3579.5 4876.06,3585 5030,3585 v1(5045,3570)
NES_UART1_RX: U1.93 UART1.3 | length 1566.9
  Top Layer w12: UART1.3 3573.21,4161.79 4132.6,4161.79 4671.57,3622.82 U1.93
NES_UART1_TX: U1.92 UART1.2 | length 1490.8
  Top Layer w12: UART1.2 3654.21,4180.79 4140.47,4180.79 4691.26,3630 U1.92
NES_UART2_RX: U1.87 UART2.3 | length 1107.3
  Top Layer w12: UART2.3 4075.21,4199.79 4148.34,4199.79 4789.24,3558.89 4789.24,3502.69 U1.87
NES_UART2_TX: U1.86 UART2.2 | length 1031.2
  Top Layer w12: UART2.2 4808.24,3566.76 4808.24,3558.31 4809.37,3557.18 U1.86
NetC15_1: C15.1 U1.12 X1.2 | length 259.8
  Top Layer w12: X1.2 4406.44,3224.68 U1.12
  Bottom Layer w50: X1.2 C15.1@4403.46,3306.06
NetC16_1: C16.1 U1.13 X1.1 | length 263.8
  Top Layer w12: X1.1 4416.13,3205 U1.13
  Bottom Layer w50: X1.1@4326.6,3112.4 C16.1
NetD1_2: 5V.2 R1.1 | length 90
  Top Layer w50: 5V.2 R1.1
NetD2_2: 3V3.2 R2.1 | length 90
  Top Layer w50: 3V3.2 R2.1
NetD3_2: LED1.2 R4.1 | length 90
  Top Layer w50: LED1.2 R4.1
NetD4_2: LED2.2 R5.1 | length 90
  Top Layer w50: LED2.2 R5.1
NetD5_2: LED3.2 R6.1 | length 90
  Top Layer w50: LED3.2 R6.1
NetR3_2: R3.2 U1.94 | length 192.9
  Top Layer w12: v1(4551.45,3653.55) 4651.89,3553.11 U1.94
NetR8_1: R8.1 USB1.D- | length 321
  Top Layer w12: USB1.D- 6217.67,4424.73 R8.1
NetR9_1: R9.1 USB1.D+ | length 322.9
  Top Layer w12: R9.1 6192.05,4429.45 USB1.D+
NRST: C17.1 R7.2 RST.2 U1.14 | length 2434.3
  Top Layer w12: v2(2767.4,3990) 2772.37,3985.03 RST.2 ; v2(4305,3008.46) 4369.91,3073.38 4369.91,3124.91 4430.31,3185.32 U1.14
  Bottom Layer w12: v2(2767.4,3990) 3323.46,3990 v2(4305,3008.46) 4302.6,3006.06 R7.2
SDIO_CK: SDIO1.4 U1.80 | length 1057.7
  Top Layer w12: U1.80 4927.48,3577.28 5018.7,3668.5 5693.5,3668.5 SDIO1.4
SDIO_CMD: SDIO1.5 U1.83 | length 1247.1
  Top Layer w12: U1.83 4868.43,3548.61 5007.32,3687.5 5672.64,3687.5 5762.53,3777.38 5762.53,3797.67 5802.38,3837.53 5877.47,3837.53 SDIO1.5
SDIO_D0: SDIO1.3 U1.65 | length 1129.8
  Top Layer w12: U1.65 5594.37,3244.37 5720,3370 v1(5720,3480)
  Bottom Layer w12: v1(5720,3480) SDIO1.3
SDIO_D1: SDIO1.2 U1.66 | length 951.3
  Top Layer w12: U1.66 5394.06,3264.06 5620,3490 v1(5620,3575)
  Bottom Layer w12: v1(5620,3575) SDIO1.2
SDIO_D2: SDIO1.7 U1.78 | length 1310
  Top Layer w12: U1.78 4966.85,3562.91 5034.44,3630.5 5955.5,3630.5 SDIO1.7
SDIO_D3: SDIO1.6 U1.79 | length 1233.8
  Top Layer w12: U1.79 4947.17,3570.1 5026.57,3649.5 5874.5,3649.5 SDIO1.6
TFT_3V3: C33.2 TFT1.2 U4.2 U4.4 | length 1368.4
  Top Layer w30: U4.4 U4.2
  Top Layer w50: TFT1.2 3013.47,2936.53 3013.47,3500.49 3180.39,3667.4 C33.2 U4.4@3433.43,3667.4
TFT_DC: TFT1.6 U1.34 | length 1985.5
  Top Layer w12: U1.34 4691.26,2793.74 v1(4705,2780)
  Bottom Layer w12: TFT1.6 3148.13,3275 3663.63,2759.5 4684.5,2759.5 v1(4705,2780)
TFT_LED: TFT1.7 U1.31 | length 1913.8
  Top Layer w12: v1(4620,2800) 4632.2,2812.2 U1.31
  Bottom Layer w12: TFT1.7 3671.5,2778.5 4598.5,2778.5 v1(4620,2800)
TFT_RES: TFT1.5 U1.33 | length 1998.9
  Top Layer w12: U1.33 4671.57,2728.43 v1(4685,2715)
  Bottom Layer w12: TFT1.5 3221.26,3175 3655.76,2740.5 4659.5,2740.5 v1(4685,2715)
TFT_SCK: TFT1.3 U1.30 | length 1872.7
  Top Layer w12: v1(4575.24,2675) 4575.24,2791.3 4612.52,2828.58 U1.30
  Bottom Layer w12: TFT1.3 3367.52,2975 3640.02,2702.5 4547.74,2702.5 v1(4575.24,2675)
TFT_SDA: TFT1.4 U1.32 | length 1930.1
  Top Layer w12: v1(4635,2700) 4651.89,2716.89 U1.32
  Bottom Layer w12: TFT1.4 3294.39,3075 3647.89,2721.5 4613.5,2721.5 v1(4635,2700)
TFT_SDO: TFT1.8
USB_DM: R8.2 U1.71 | length 1710.6
  Top Layer w12: U1.71 5118.65,3362.48 5135.53,3345.6 5187.47,3345.6 v2(5230,3388.13)
  Bottom Layer w12: v2(5230,3388.13) 5403,3561.13 5403,3763 5809.13,4169.13 6049.13,4169.13 6197.6,4317.6 v2(6250,4317.6)
USB_DP: R9.2 R10.1 U1.70 | length 1901.3
  Top Layer w12: U1.70 5111.47,3342.8 5127.66,3326.6 5208.07,3326.6 5258,3376.53 5258,3399.73 5230,3427.73 v2(5230,3430)
  Bottom Layer w12: v2(5230,3430) 5384,3584 5384,3770.87 5801.26,4188.13 6025.53,4188.13 v2(6155,4317.6) 6192.4,4355 6302.6,4355 v2(6340,4317.6)
VCAP1: C19.2 U1.49 | length 93.7
  Top Layer w12: v2(4960,2825) 4986.54,2851.54 U1.49
VCAP2: C18.2 U1.73 | length 91.4
  Top Layer w12: v2(4990,3367.6) 5024.25,3401.85 U1.73
pads on no net: APU.12 JS1.9 JS1.10 JS2.9 JS2.10 U1.7 U1.8 U1.9 U1.15 U1.16 U1.17 U1.18 U1.35 U1.36 U1.37 U1.47 U1.48 U1.51 U1.63 U1.64 U1.67 U1.68 U1.69 U1.77 U1.81 U1.82 U1.84 U1.85 U1.88 U1.89 U1.90 U1.91 U1.95 U1.96 USB1.P$5 USB1.P$6 USB1.TAB

## Polygon pours and split planes (outlines as drawn)
3V3 on Top Layer "3V3" (solid, remove dead copper, pour order 13): 4905,4155 4905,3775 5000,3775 5000,3700 5295,3700 5295,4155
GND on Top Layer "GND" (solid, remove dead copper, pour order 14): 2250,1400 7310,1400 ccw(c7310,2520) 8430,2520 8430,3735 ccw(c7315,3735) 7315,4850 2255,4850 ccw(c2255,3740) 1145,3740 1145,2505 ccw(c2250,2505)
3V3 on Bottom Layer "3V3" (solid, remove dead copper, pour order 12): 4905,4155 4905,3775 5000,3775 5000,3655 5147.5,3507.5 5295,3655 5295,4155
GND on Bottom Layer "GND" (solid, remove dead copper, pour order 15): 2250,1400 7310,1400 ccw(c7310,2520) 8430,2520 8430,3735 ccw(c7315,3735) 7315,4850 2255,4850 ccw(c2255,3740) 1145,3740 1145,2505 ccw(c2250,2505)

## Keep-outs
Keep-Out Layer:
  the board outline again, w8

## Silkscreen, mask and mechanical layers (free items; w line width, h text height)
Top Overlay:
  lines w39.37: 3025,2040 6550,2040 6550,4210 3025,4210 3025,2040
  text "Anshuman & Aaron" at 3085,2205 h157.48
  text "STM32NES" at 4655,2135 h393.7
  text "ELEC3300 V1.0 25/03/19" at 3085,2105 h118.11